# Altium PCB PCB1.pcbdoc
Units mil, origin at the board's own origin, x right, y up, seen from the top; angles counter-clockwise.
Board outline 797.75 x 971.83 mil, 2 copper layers (Top Layer, Bottom Layer); 1 components, 0 nets, 3 pads, 0 vias.
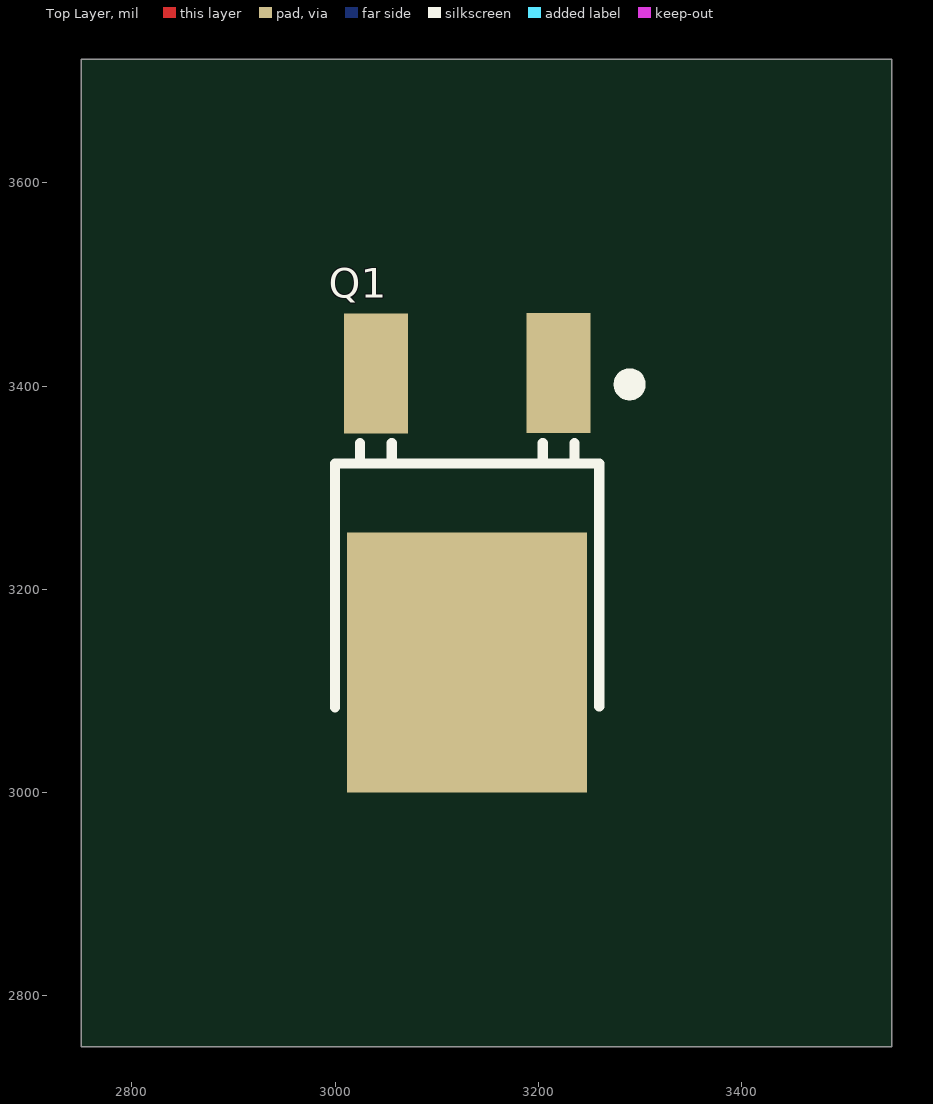
[diagram p0: Top Layer view]
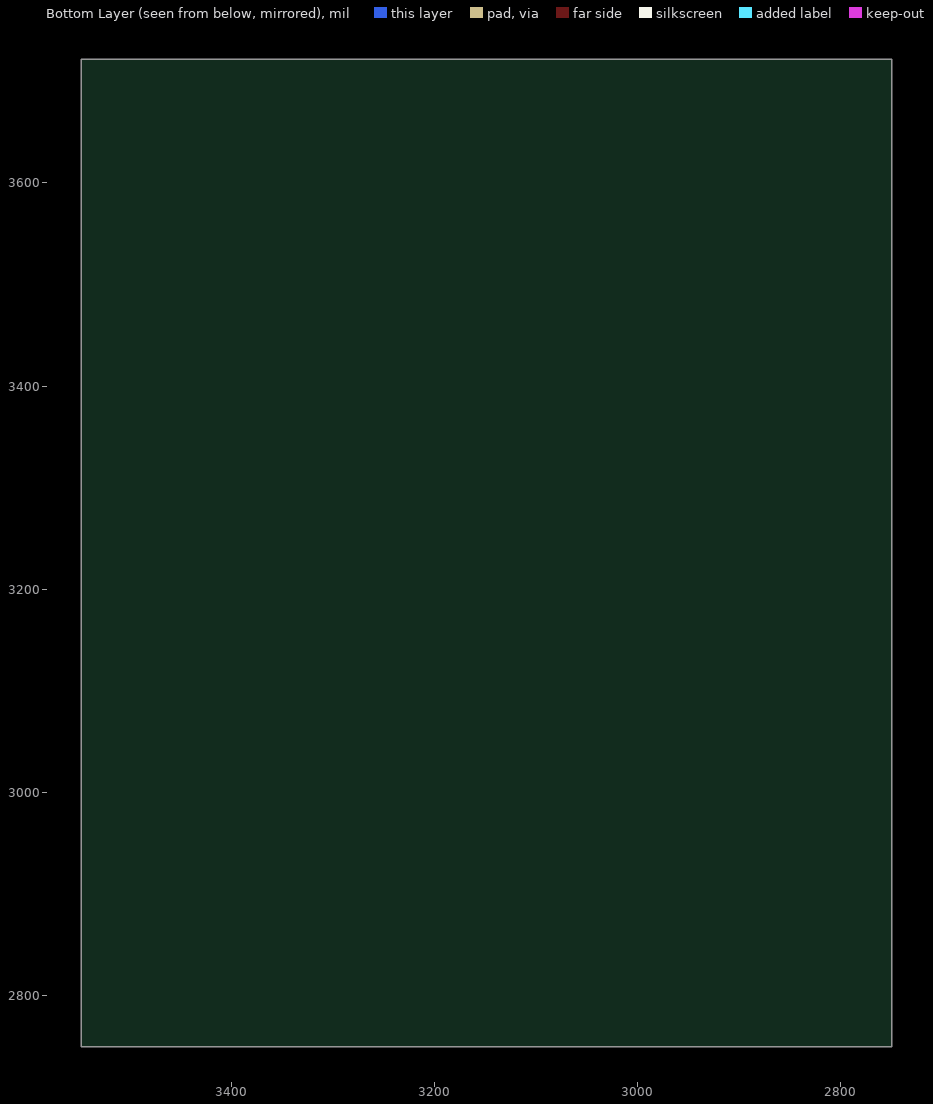
[diagram p1: Bottom Layer view, seen from below]

## Layer stack, top to bottom
Top Layer: signal copper (thickness not stored)
Dielectric: dielectric 12.6, FR-4, Dk 4.8
Bottom Layer: signal copper (thickness not stored)

## Board outline
3547.75,2750 2750,2750 2750,3721.83 3547.75,3721.83

## Components (designator, comment, footprint, x,y, rotation, side; value= is the part's Value field where it differs from the comment)
Q1 "IRFR220NTRPBF" TO-252-2_L6.6-W6.1-P4.57-LS9.9-TR-CW 3130,3270.36 r0 top

## Footprints (in the part's own frame and the unit in brackets; to place one, negate y for a bottom-side part, rotate by r counter-clockwise, add the part's x,y. Pads: shape width x height; smd on the part's side, far side on the other; paste and mask are expansions set on the pad)
TO-252-2_L6.6-W6.1-P4.57-LS9.9-TR-CW [mm]
  rect 1.6x3 smd: 1(2.285,3.617) 3(-2.285,3.611)
  rect 6x6.5 smd: 2(0,-3.617)
  silkscreen extent -3.3,-4.74 4.26,3.54

## Nets (pads, with @x,y where several pads share a name; then routed paths per layer and width w, separated by ;. In a path a pad name is that pad's centre, name@x,y a point inside that pad or via, vN(x,y) a via of type N, cw(c..) or ccw(c..) an arc to the next point about the centre after c; other vN are vias at no path point)
pads on no net: Q1.1 Q1.2 Q1.3